# EAGLE board qfn32-36 (EAGLE 7.7.0)
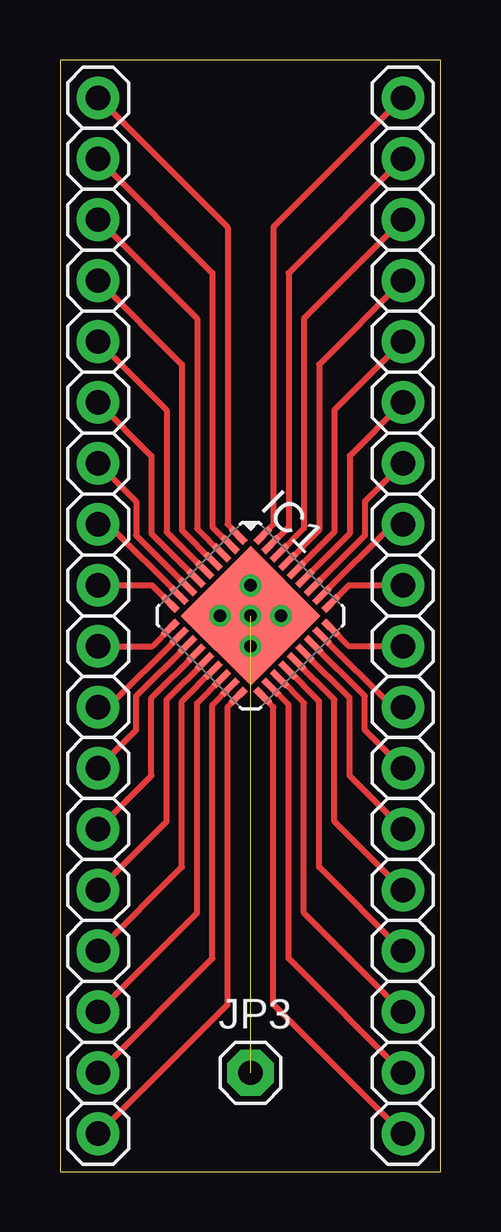
[diagram p0: board, top side]
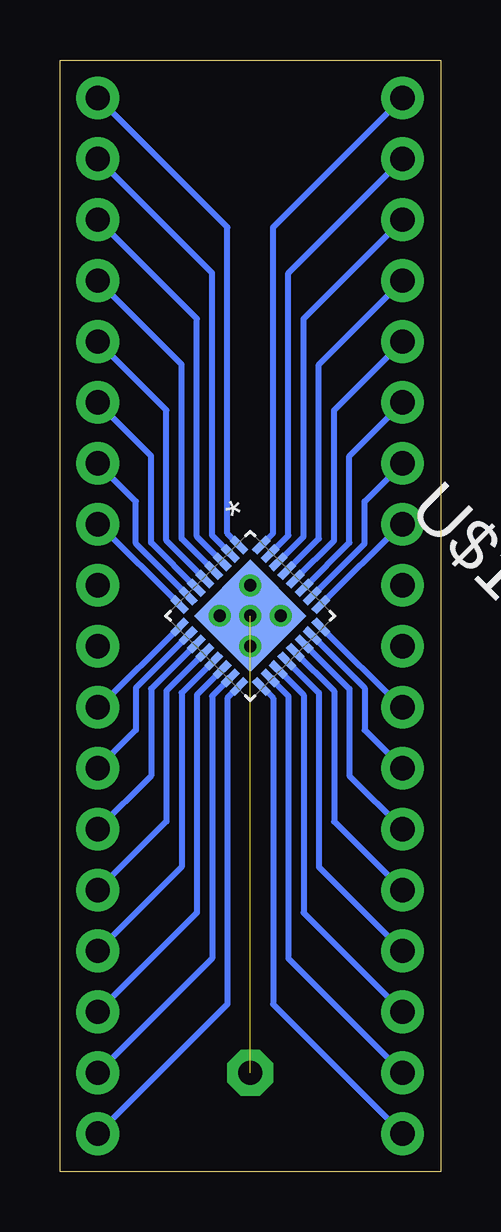
[diagram p1: board, bottom side, seen from below]

Size 15.86 x 46.34 mm. Coordinates in mm from the lower left corner, seen from the top.
Outline: 0,0 15.86,0 15.86,46.35 0,46.35 0,0
Copper layers (1*16): Top 0.035mm / dielectric 1.5mm / Bottom 0.035mm
Design rules "default": minimum track width 10mil, minimum drill 24mil, track to track 8mil, track to pad 8mil, pad to pad 8mil, via to via 8mil, smd to smd 8mil, copper to edge 40mil, drill to drill 8mil, minimum pad ring 10mil, minimum via ring 8mil, stop-mask expansion 4mil, vias tented up to drill 0mil, thermal gap 10mil

## Footprints (pad centres in the part's own frame; a part is rotated, then mirrored left to right if it is on the bottom)
QFN36-6X6 = smd 0.84 x 0.28: 1 -2.735,2; 9 -2.735,-2; 19 2.735,-2; 27 2.735,2 | smd 0.89 x 0.28: 2 -2.71,1.5; 3 -2.71,1; 4 -2.71,0.5; 5 -2.71,0; 6 -2.71,-0.5; 7 -2.71,-1; 8 -2.71,-1.5; 20 2.71,-1.5; 21 2.71,-1; 22 2.71,-0.5; 23 2.71,0; 24 2.71,0.5; 25 2.71,1; 26 2.71,1.5 | smd 0.28 x 0.84: 10 -2,-2.735; 18 2,-2.735; 28 2,2.735; 36 -2,2.735 | smd 0.28 x 0.89: 11 -1.5,-2.71; 12 -1,-2.71; 13 -0.5,-2.71; 14 0,-2.71; 15 0.5,-2.71; 16 1,-2.71; 17 1.5,-2.71; 29 1.5,2.71; 30 1,2.71; 31 0.5,2.71; 32 0,2.71; 33 -0.5,2.71; 34 -1,2.71; 35 -1.5,2.71 | smd 4.1 x 4.1: EXP 0,0
1X18-BIG = drill 1.016 pad 1.778: 1 -21.59,0; 2 -19.05,0; 3 -16.51,0; 4 -13.97,0; 5 -11.43,0; 6 -8.89,0; 7 -6.35,0; 8 -3.81,0; 9 -1.27,0; 10 1.27,0; 11 3.81,0; 12 6.35,0; 13 8.89,0; 14 11.43,0; 15 13.97,0; 16 16.51,0; 17 19.05,0; 18 21.59,0
1X01 = drill 1.016 pad 1.93 octagon: 1 0,0
QFN32-5X5 = smd 0.813 x 0.305: 1 -2.413,1.753; 2 -2.413,1.245; 3 -2.413,0.762; 4 -2.413,0.254; 5 -2.413,-0.254; 6 -2.413,-0.762; 7 -2.413,-1.245; 8 -2.413,-1.753; 17 2.413,-1.753; 18 2.413,-1.245; 19 2.413,-0.762; 20 2.413,-0.254; 21 2.413,0.254; 22 2.413,0.762; 23 2.413,1.245; 24 2.413,1.753 | smd 0.305 x 0.813: 9 -1.753,-2.413; 10 -1.245,-2.413; 11 -0.762,-2.413; 12 -0.254,-2.413; 13 0.254,-2.413; 14 0.762,-2.413; 15 1.245,-2.413; 16 1.753,-2.413; 25 1.753,2.413; 26 1.245,2.413; 27 0.762,2.413; 28 0.254,2.413; 29 -0.254,2.413; 30 -0.762,2.413; 31 -1.245,2.413; 32 -1.753,2.413 | smd 3.302 x 3.302: PAD 0,0

## Placement (x,y rotation side)
IC1  QFN36A-C-GM  [QFN36-6X6]  7.94,23.18 315 top
JP1  [1X18-BIG]  1.59,23.18 270 top
JP2  [1X18-BIG]  14.29,23.18 270 top
JP3  [1X01]  7.94,4.13 0 top
U$1  QFN32  [QFN32-5X5]  7.94,23.18 315 bottom

## Library data of the parts
IC1 = qfn packages; MF: Silicon Labs; MPN: Si5317A-C-GM; OC_FARNELL: unknown; OC_NEWARK: unknown
JP1-JP3 = adafruit
U$1 = qfn packages

## Nets
N$1: IC1.1 JP1.1 U$1.32
N$2: IC1.2 JP1.2 U$1.31
N$3: IC1.3 JP1.3 U$1.30
N$4: IC1.4 JP1.4 U$1.29
N$5: IC1.5 JP1.5 U$1.28
N$6: IC1.6 JP1.6 U$1.27
N$7: IC1.7 JP1.7 U$1.26
N$8: IC1.8 JP1.8 U$1.25
N$9: IC1.10 JP1.10
N$10: IC1.9 JP1.9
N$11: IC1.11 JP1.11 U$1.24
N$12: IC1.12 JP1.12 U$1.23
N$13: IC1.13 JP1.13 U$1.22
N$14: IC1.14 JP1.14 U$1.21
N$15: IC1.15 JP1.15 U$1.20
N$16: IC1.16 JP1.16 U$1.19
N$17: IC1.17 JP1.17 U$1.18
N$18: IC1.18 JP1.18 U$1.17
N$19: IC1.36 JP2.1 U$1.1
N$20: IC1.35 JP2.2 U$1.2
N$21: IC1.34 JP2.3 U$1.3
N$22: IC1.33 JP2.4 U$1.4
N$23: IC1.32 JP2.5 U$1.5
N$24: IC1.31 JP2.6 U$1.6
N$25: IC1.30 JP2.7 U$1.7
N$26: IC1.29 JP2.8 U$1.8
N$27: IC1.28 JP2.9
N$28: IC1.27 JP2.10
N$29: IC1.26 JP2.11 U$1.9
N$30: IC1.25 JP2.12 U$1.10
N$31: IC1.24 JP2.13 U$1.11
N$32: IC1.23 JP2.14 U$1.12
N$33: IC1.22 JP2.15 U$1.13
N$34: IC1.21 JP2.16 U$1.14
N$35: IC1.19 JP2.18 U$1.16
N$36: IC1.20 JP2.17 U$1.15
N$42: JP3.1 U$1.PAD

## Tracks (layer width: path | path; a pad name or v marks a point on that pad's centre or on a via)
N$1
  Top 0.254: JP1.1 6.98,39.37 6.98,26.99 7.42,26.55 IC1.1
  Bottom 0.254: U$1.32 6.98,26.61 6.98,39.37 JP1.1
N$2
  Top 0.254: JP1.2 6.35,37.47 6.35,26.89 IC1.2
  Bottom 0.254: U$1.31 6.35,26.53 6.35,37.47 JP1.2
N$3
  Top 0.254: JP1.3 5.72,35.56 5.72,26.81 IC1.3
  Bottom 0.254: U$1.30 5.72,26.48 5.72,35.56 JP1.3
N$4
  Top 0.254: JP1.4 5.08,33.65 5.08,26.74 IC1.4
  Bottom 0.254: U$1.29 5.08,26.39 5.08,33.65 JP1.4
N$5
  Top 0.254: JP1.5 4.44,31.75 4.44,26.67 IC1.5
  Bottom 0.254: U$1.28 4.44,26.31 4.44,31.75 JP1.5
N$6
  Top 0.254: JP1.6 3.81,29.85 3.81,26.6 IC1.6
  Bottom 0.254: U$1.27 3.81,26.23 3.81,29.85 JP1.6
N$7
  Top 0.254: JP1.7 3.17,27.94 3.17,26.53 IC1.7
  Bottom 0.254: U$1.26 3.17,26.18 3.17,27.94 JP1.7
N$8
  Top 0.254: IC1.8 2.01,26.99 JP1.8
  Bottom 0.254: U$1.25 1.65,26.99 JP1.8
N$9
  Top 0.254: JP1.10 3.84,21.91 IC1.10
N$10
  Top 0.254: IC1.9 3.84,24.45 JP1.9
N$11
  Top 0.254: JP1.11 2.01,19.37 IC1.11
  Bottom 0.254: U$1.24 1.65,19.37 JP1.11
N$12
  Top 0.254: JP1.12 3.17,18.42 3.17,19.83 IC1.12
  Bottom 0.254: U$1.23 3.17,20.18 3.17,18.42 JP1.12
N$13
  Top 0.254: JP1.13 3.81,16.51 3.81,19.76 IC1.13
  Bottom 0.254: U$1.22 3.81,20.13 3.81,16.51 JP1.13
N$14
  Top 0.254: JP1.14 4.44,14.61 4.44,19.68 IC1.14
  Bottom 0.254: U$1.21 4.44,20.04 4.44,14.61 JP1.14
N$15
  Top 0.254: JP1.15 5.08,12.7 5.08,19.61 IC1.15
  Bottom 0.254: U$1.20 5.08,19.96 5.08,12.7 JP1.15
N$16
  Top 0.254: JP1.16 5.72,10.79 5.72,19.54 IC1.16
  Bottom 0.254: U$1.19 5.72,19.88 5.72,10.79 JP1.16
N$17
  Top 0.254: JP1.17 6.35,8.89 6.35,19.47 IC1.17
  Bottom 0.254: U$1.18 6.35,19.83 6.35,8.89 JP1.17
N$18
  Top 0.254: JP1.18 6.98,6.98 6.98,19.37 7.42,19.8 IC1.18
  Bottom 0.254: U$1.17 6.98,19.75 6.98,6.98 JP1.18
N$19
  Top 0.254: JP2.1 8.89,39.37 8.89,26.99 8.46,26.55 IC1.36
  Bottom 0.254: U$1.1 8.89,26.61 8.89,39.37 JP2.1
N$20
  Top 0.254: JP2.2 9.52,37.47 9.52,26.89 IC1.35
  Bottom 0.254: U$1.2 9.52,26.53 9.52,37.47 JP2.2
N$21
  Top 0.254: JP2.3 10.16,35.56 10.16,26.81 IC1.34
  Bottom 0.254: U$1.3 10.16,26.48 10.16,35.56 JP2.3
N$22
  Top 0.254: JP2.4 10.8,33.65 10.8,26.74 IC1.33
  Bottom 0.254: U$1.4 10.8,26.39 10.8,33.65 JP2.4
N$23
  Top 0.254: JP2.5 11.43,31.75 11.43,26.67 IC1.32
  Bottom 0.254: U$1.5 11.43,26.31 11.43,31.75 JP2.5
N$24
  Top 0.254: JP2.6 12.06,29.85 12.06,26.6 IC1.31
  Bottom 0.254: U$1.6 12.06,26.23 12.06,29.85 JP2.6
N$25
  Top 0.254: JP2.7 12.7,27.94 12.7,26.53 IC1.30
  Bottom 0.254: U$1.7 12.7,26.18 12.7,27.94 JP2.7
N$26
  Top 0.254: JP2.8 13.87,26.99 IC1.29
  Bottom 0.254: U$1.8 14.23,26.99 JP2.8
N$27
  Top 0.254: JP2.9 12.04,24.45 IC1.28
N$28
  Top 0.254: JP2.10 12.04,21.91 IC1.27
N$29
  Top 0.254: JP2.11 13.87,19.37 IC1.26
  Bottom 0.254: U$1.9 14.23,19.37 JP2.11
N$30
  Top 0.254: JP2.12 12.7,18.42 12.7,19.83 IC1.25
  Bottom 0.254: U$1.10 12.7,20.18 12.7,18.42 JP2.12
N$31
  Top 0.254: JP2.13 12.06,16.51 12.06,19.76 IC1.24
  Bottom 0.254: U$1.11 12.06,20.13 12.06,16.51 JP2.13
N$32
  Top 0.254: JP2.14 11.43,14.61 11.43,19.68 IC1.23
  Bottom 0.254: U$1.12 11.43,20.04 11.43,14.61 JP2.14
N$33
  Top 0.254: JP2.15 10.8,12.7 10.8,19.61 IC1.22
  Bottom 0.254: U$1.13 10.8,19.96 10.8,12.7 JP2.15
N$34
  Top 0.254: JP2.16 10.16,10.79 10.16,19.54 IC1.21
  Bottom 0.254: U$1.14 10.16,19.88 10.16,10.79 JP2.16
N$35
  Top 0.254: JP2.18 8.89,6.98 8.89,19.37 8.46,19.8 IC1.19
  Bottom 0.254: U$1.16 8.89,19.75 8.89,6.98 JP2.18
N$36
  Top 0.254: JP2.17 9.52,8.89 9.52,19.47 IC1.20
  Bottom 0.254: U$1.15 9.52,19.83 9.52,8.89 JP2.17
N$37  (via drill 0.51)
  other vias: 7.94,23.18
N$38  (via drill 0.51)
  other vias: 6.67,23.18
N$39  (via drill 0.51)
  other vias: 7.94,24.45
N$40  (via drill 0.51)
  other vias: 9.21,23.18
N$41  (via drill 0.51)
  other vias: 7.94,21.91
N$42  (1 unrouted)

## Text on the board
SilkScreenTOP: QFN36 / 6X6 / 0.5 | * | 9 | 28 | 10 | 27 | 1 / 2 / 3 / 4 / 5 / 6 / 7 / 8 / / / 11 / 12 / 13 / 14 / 15 / 16 / 17 / 18 | 36 / 35 / 34 / 33 / 32 / 31 / 30 / 29 / / / 26 / 25 / 24 / 23 / 22 / 21 / 20 / 19
SilkScreenBOTTOM: QFN32 / 5X5 / 0.5 | 32 / 31 / 30 / 29 / 28 / 27 / 26 / 25 / / / 24 / 23 / 22 / 21 / 20 / 19 / 18 / 17 | 1 / 2 / 3 / 4 / 5 / 6 / 7 / 8 / / / 9 / 10 / 11 / 12 / 13 / 14 / 15 / 16